# EAGLE board ardBeeQueen_12-pin_lcd 50x52 (EAGLE 9.5.1)
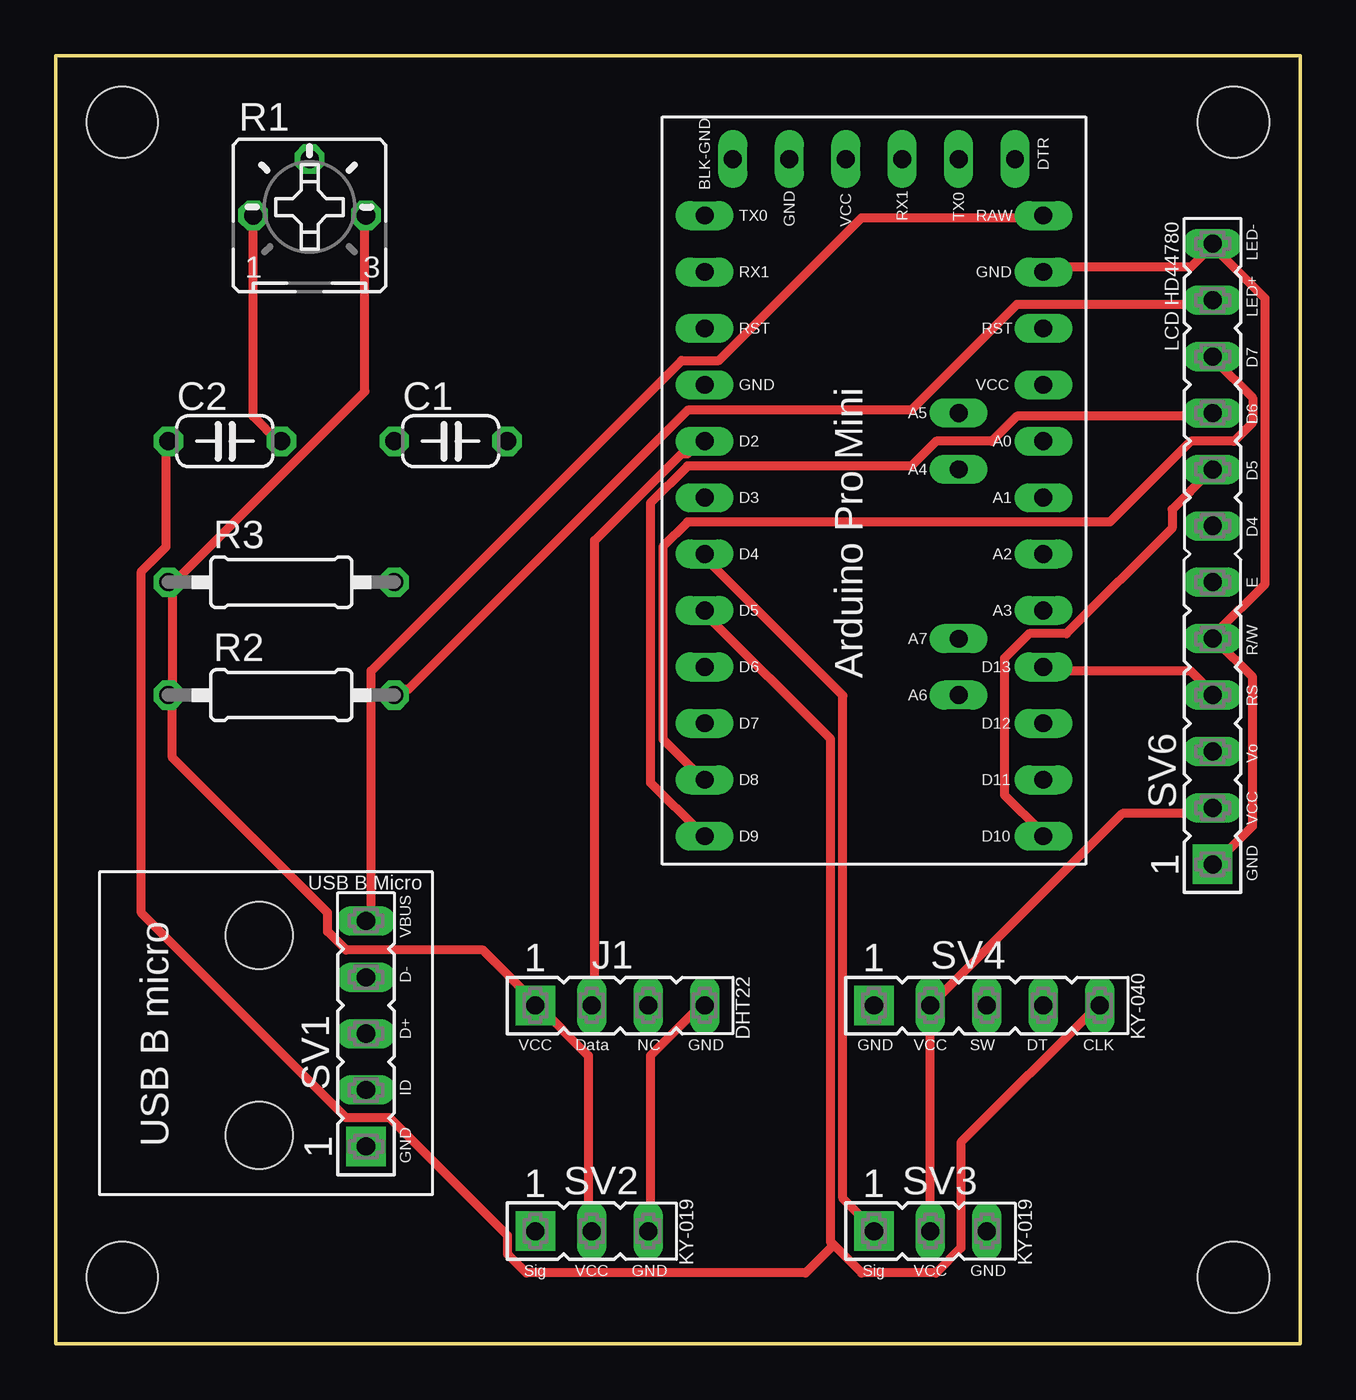
[diagram p0: board, top side]
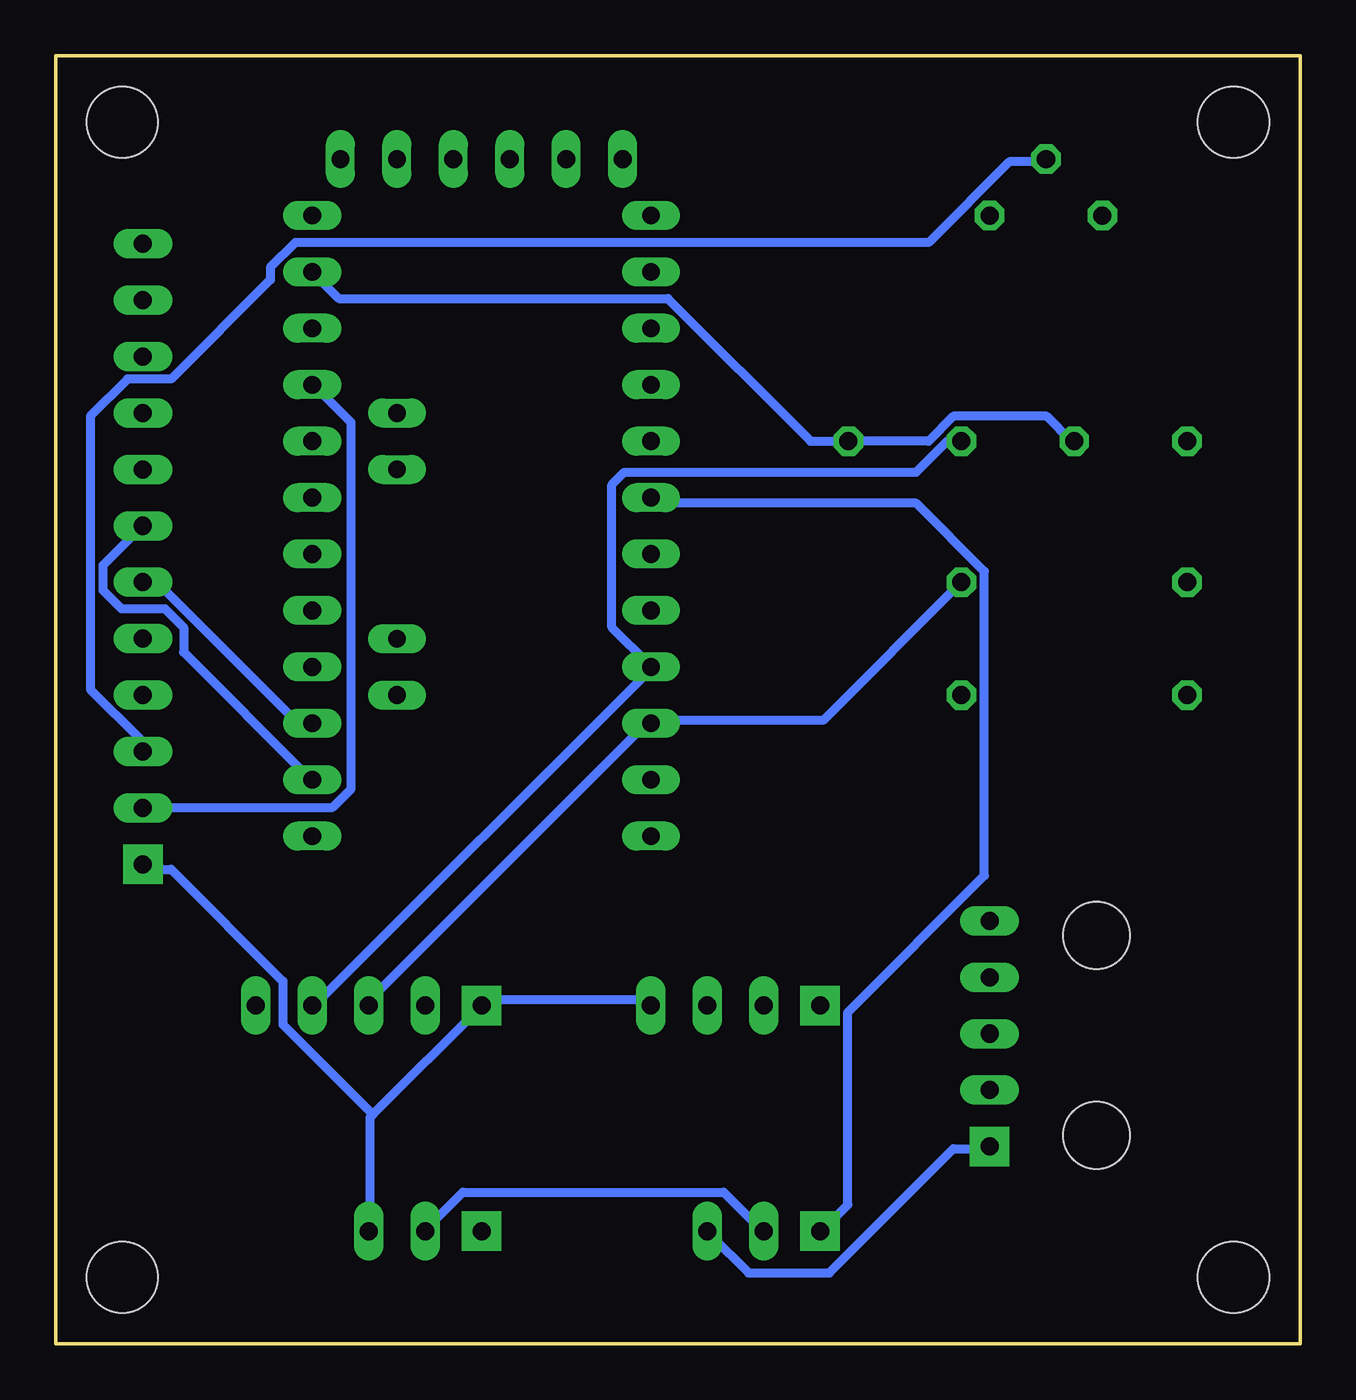
[diagram p1: board, bottom side, seen from below]

Size 56 x 58 mm. Coordinates in mm from the lower left corner, seen from the top.
Outline: 0,0 56,0 56,58 0,58 0,0
Copper layers (1*16): Top 0.035mm / dielectric 1.5mm / Bottom 0.035mm
Design rules "default": minimum track width 6mil, minimum drill 0.35mm, track to track 6mil, track to pad 6mil, pad to pad 6mil, via to via 6mil, smd to smd 6mil, copper to edge 40mil, drill to drill 6mil, minimum pad ring 10mil, minimum via ring 8mil, stop-mask expansion 4mil, vias tented up to drill 0mil, thermal gap 10mil
Net classes: 0 default: width 0.406 mm, clearance 0.152 mm
Holes 3.2 mm at 3,3 53,3 53,55 3,55

## Footprints (pad centres in the part's own frame; a part is rotated, then mirrored left to right if it is on the bottom)
C050-024X044 = drill 0.813 octagon: 1 -2.54,0; 2 2.54,0
DHT22_4-PIN_FEMALE_HEADER = drill 0.813 long: DATA 2.54,0; GND 7.62,0; NC 5.08,0 | drill 0.813 pad 1.778 square: VCC 0,0
B25P = drill 0.813 octagon: A -2.54,0; E 2.54,0; S 0,2.54
0207/10 = drill 0.813 octagon: 1 -5.08,0; 2 5.08,0
MICROUSB_B_BREAKOUT_5-PIN_FEMALE_HEADER_W_MOUNT_HOLES = drill 0.813 long: D+ 5.08,0; D- 7.62,0; ID 2.54,0; VBUS 10.16,0 | drill 0.813 pad 1.778 square: GND 0,0 | hole 3: 0.508,4.81; 9.508,4.81
KY-019_3-PIN_FEMALE_HEADER = drill 0.813 long: GND 5.08,0; VCC 2.54,0 | drill 0.813 pad 1.778 square: SIG 0,0
KY-040_5-PIN_FEMALE_HEADER = drill 0.813 long: CLK 10.16,0; DT 7.62,0; SW 5.08,0; VCC 2.54,0 | drill 0.813 pad 1.778 square: GND 0,0
LCD-HD44780-12-PIN_FEMALE_HEADER = drill 0.813 long: D4 15.24,0; D5 17.78,0; D6 20.32,0; D7 22.86,0; E 12.7,0; LED+ 25.4,0; LED- 27.94,0; R/W 10.16,0; RS 7.62,0; VCC 2.54,0; VO 5.08,0 | drill 0.813 pad 1.778 square: GND 0,0
ARDUINO_PRO_MINI-2 = drill 0.8 long: A0 6.35,2.54; A1 6.35,0; A2 6.35,-2.54; A3 6.35,-5.08; A4 2.54,1.27; A5 2.54,3.81; A6 2.54,-8.89; A7 2.54,-6.35; BLK-GND -7.62,15.24; D2 -8.89,2.54; D3 -8.89,0; D4 -8.89,-2.54; D5 -8.89,-5.08; D6 -8.89,-7.62; D7 -8.89,-10.16; D8 -8.89,-12.7; D9 -8.89,-15.24; D10 6.35,-15.24; D11 6.35,-12.7; D12 6.35,-10.16; D13 6.35,-7.62; DTR 5.08,15.24; GND 6.35,10.16; GND1 -8.89,5.08; GND3 -5.08,15.24; RAW 6.35,12.7; RST 6.35,7.62; RST1 -8.89,7.62; RX1 -8.89,10.16; RX1-1 0,15.24; TX0 -8.89,12.7; TX0-1 2.54,15.24; VCC 6.35,5.08; VCC1 -2.54,15.24

## Placement (x,y rotation side)
C1  0,47u  [C050-024X044]  17.78,40.64 0 top
C2  0.47u  [C050-024X044]  7.62,40.64 0 top
J1  [DHT22_4-PIN_FEMALE_HEADER]  21.59,15.24 0 top
R1  10K  [B25P]  11.43,50.8 0 top
R2  220R  [0207/10]  10.16,29.21 0 top
R3  10K  [0207/10]  10.16,34.29 0 top
SV1  [MICROUSB_B_BREAKOUT_5-PIN_FEMALE_HEADER_W_MOUNT_HOLES]  13.97,8.89 90 top
SV2  [KY-019_3-PIN_FEMALE_HEADER]  21.59,5.08 0 top
SV3  [KY-019_3-PIN_FEMALE_HEADER]  36.83,5.08 0 top
SV4  [KY-040_5-PIN_FEMALE_HEADER]  36.83,15.24 0 top
SV6  [LCD-HD44780-12-PIN_FEMALE_HEADER]  52.07,21.59 90 top
U$1  ARDUINO_PRO_MINI-2  [ARDUINO_PRO_MINI-2]  38.1,38.1 0 top

## Library data of the parts
C1 C2 = rcl; SPICEPREFIX: C
J1 = myLib-01-Headers; PROD_ID: CONN-09696
R1 = pot
R2 R3 = rcl; SPICEPREFIX: R
SV1 SV6 = myLib-01-Headers
SV2-SV4 = myLib-01-Headers; OC_FARNELL: unknown; OC_NEWARK: unknown
U$1 = myLib-02-Arduino

## Nets
N$1: R1.S SV6.VO
N$2: R2.2 SV6.LED+
N$3: SV6.D6 U$1.D9
N$4: SV6.D7 U$1.D8
N$5: SV6.D5 U$1.D10
N$6: SV6.D4 U$1.D11
N$7: SV6.E U$1.D12
N$8: SV6.RS U$1.D13
N$9: R3.2 SV4.SW U$1.D7
N$10: C1.1 SV4.DT U$1.D6
N$11: C2.1 SV4.CLK U$1.D5
N$12: J1.DATA U$1.D2
N$13: SV2.SIG U$1.D3
N$14: SV3.SIG U$1.D4
N$15: J1.VCC R1.E R2.1 R3.1 SV2.VCC SV3.VCC SV4.VCC SV6.VCC U$1.VCC
N$16: C1.2 C2.2 J1.GND R1.A SV1.GND SV2.GND SV3.GND SV4.GND SV6.GND SV6.LED- SV6.R/W U$1.GND
N$17: SV1.VBUS U$1.RAW

## Tracks (layer width: path | path; a pad name or v marks a point on that pad's centre or on a via)
N$1
  Bottom 0.406: SV6.VO 52.2,26.67 52.2,27.23 54.43,29.46 54.43,41.76 52.76,43.43 50.8,43.43 46.33,47.9 46.33,48.46 45.21,49.58 16.71,49.58 13.08,53.21 11.68,53.21 R1.S
N$2
  Top 0.406: R2.2 15.32,29.46 15.87,29.46 28.45,42.04 38.51,42.04 43.26,46.79 51.92,46.79 SV6.LED+
N$3
  Top 0.406: U$1.D9 29.01,23.04 26.77,25.27 26.77,37.85 28.45,39.52 38.51,39.52 39.62,40.64 42.14,40.64 43.26,41.76 51.92,41.76 SV6.D6
N$4
  Top 0.406: U$1.D8 29.01,25.55 27.33,27.23 27.33,35.89 28.45,37.01 47.45,37.01 51.08,40.64 53.03,40.64 53.87,41.48 53.87,42.6 52.2,44.27 SV6.D7
N$5
  Top 0.406: U$1.D10 44.37,23.04 42.7,24.71 42.7,30.86 43.81,31.98 45.49,31.98 50.24,36.73 50.24,37.57 51.92,39.24 SV6.D5
N$6
  Bottom 0.406: U$1.D11 44.65,25.55 50.24,31.14 50.24,32.26 51.08,33.1 53.03,33.1 53.87,33.93 53.87,35.05 52.2,36.73 SV6.D4
N$7
  Bottom 0.406: U$1.D12 44.65,28.07 45.21,28.07 51.36,34.21 51.92,34.21 SV6.E
N$8
  Top 0.406: U$1.D13 44.65,30.3 51.08,30.3 51.92,29.46 SV6.RS
N$9
  Bottom 0.406: R3.2 21.46,28.07 29.01,28.07 U$1.D7 29.29,28.07 41.86,15.49 SV4.SW
N$10
  Bottom 0.406: SV4.DT 44.37,15.21 29.29,30.3 U$1.D6 29.29,30.58 30.96,32.26 30.96,38.68 30.4,39.24 17.27,39.24 15.87,40.64 C1.1
N$11
  Top 0.406: 35.01,4.46 36.27,3.2 39.62,3.2 40.74,4.32 40.74,9.07 46.89,15.21 SV4.CLK | 35.01,4.46 34.87,4.6 34.87,27.23 29.29,32.82 U$1.D5 | 35.01,4.46 33.76,3.2 21.18,3.2 20.34,4.04 20.34,4.88 15.04,10.19 13.08,10.19 3.86,19.41 3.86,34.77 4.98,35.89 4.98,40.64 C2.1
N$12
  Top 0.406: U$1.D2 29.01,40.64 28.45,40.08 28.17,40.08 24.26,36.17 24.26,15.49 J1.DATA
N$13
  Bottom 0.406: U$1.D3 29.01,37.85 17.27,37.85 14.2,34.77 14.2,21.08 20.34,14.94 20.34,6.27 21.46,5.16 SV2.SIG
N$14
  Top 0.406: U$1.D4 29.29,35.33 35.43,29.19 35.43,6.55 36.83,5.16 SV3.SIG
N$15
  Top 0.406: 5.26,34.21 5.26,29.46 R2.1 5.26,29.19 5.26,26.39 12.24,19.41 12.24,18.57 13.08,17.73 19.23,17.73 21.46,15.49 J1.VCC 21.74,15.21 23.98,12.98 23.98,5.16 SV2.VCC | 5.26,34.21 13.92,42.88 13.92,50.7 R1.E | 5.26,34.21 R3.1 | SV3.VCC 39.34,5.16 39.34,15.21 SV4.VCC 48.01,23.88 51.92,23.88 SV6.VCC
  Bottom 0.406: U$1.VCC 44.37,43.16 42.7,41.48 42.7,24.99 43.54,24.16 51.92,24.16 SV6.VCC | SV2.VCC 24.26,5.16 25.93,6.83 37.67,6.83 39.34,5.16 SV3.VCC
N$16
  Top 0.406: SV2.GND 26.77,5.16 26.77,12.98 29.01,15.21 J1.GND | R1.A 8.89,41.76 10.01,40.64 C2.2 | U$1.GND 44.65,48.46 51.08,48.46 51.92,49.3 SV6.LED- 52.2,49.3 54.43,47.07 54.43,34.21 52.2,31.98 SV6.R/W 52.2,31.7 53.87,30.02 53.87,23.32 52.2,21.64 SV6.GND
  Bottom 0.406: 41.72,10.32 36.83,15.21 SV4.GND 36.83,15.49 29.29,15.49 J1.GND | 41.72,10.32 41.86,10.19 41.86,5.16 SV3.GND | SV1.GND 14.2,8.79 15.6,8.79 21.18,3.2 24.82,3.2 26.49,4.88 SV2.GND | C2.2 10.29,40.64 11.4,41.76 15.6,41.76 16.71,40.64 C1.2 22.02,40.64 28.45,47.07 43.26,47.07 U$1.GND | 41.72,10.32 45.77,14.38 45.77,16.33 50.8,21.36 51.92,21.36 SV6.GND
N$17
  Top 0.406: U$1.RAW 44.37,50.7 36.27,50.7 29.84,44.27 28.17,44.27 14.2,30.3 14.2,19.13 SV1.VBUS